# EAGLE board SparkFun GPS NEO_M9N_ANT (EAGLE 9.5.2)
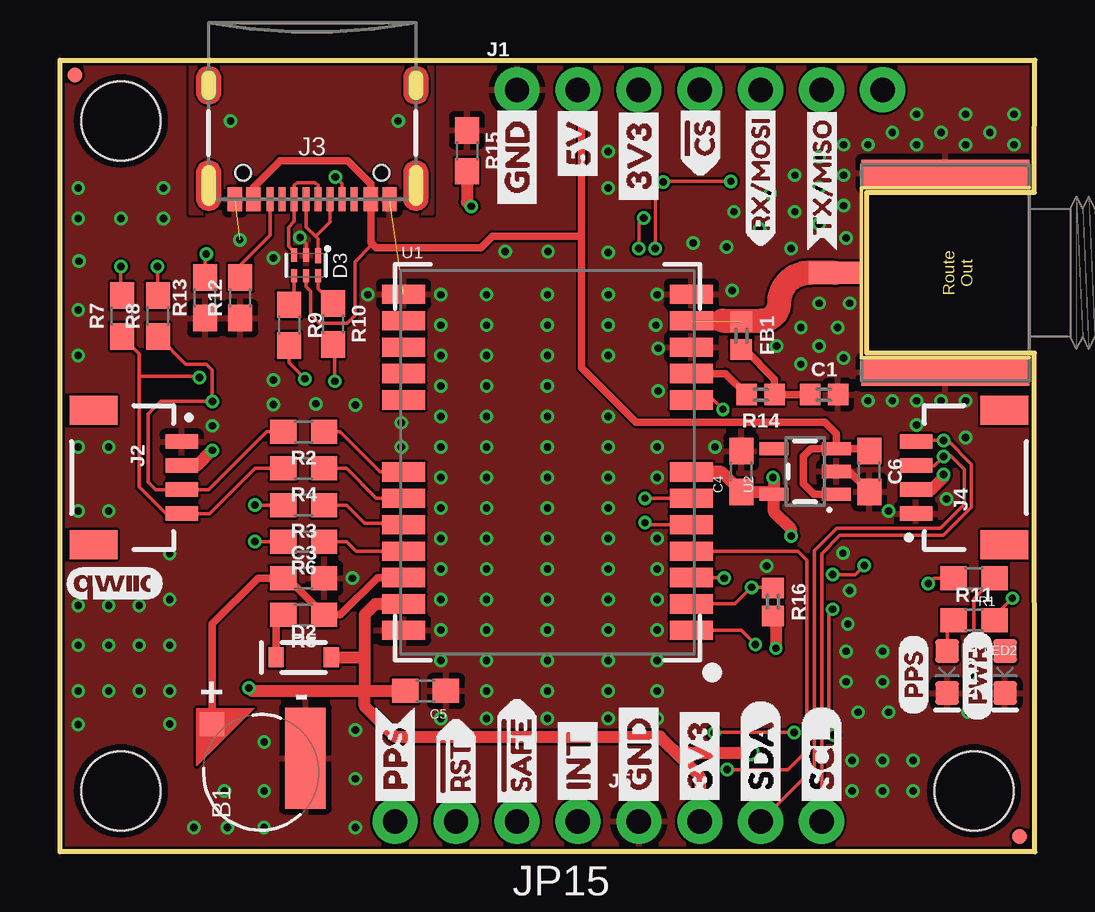
[diagram p0: board, top side]
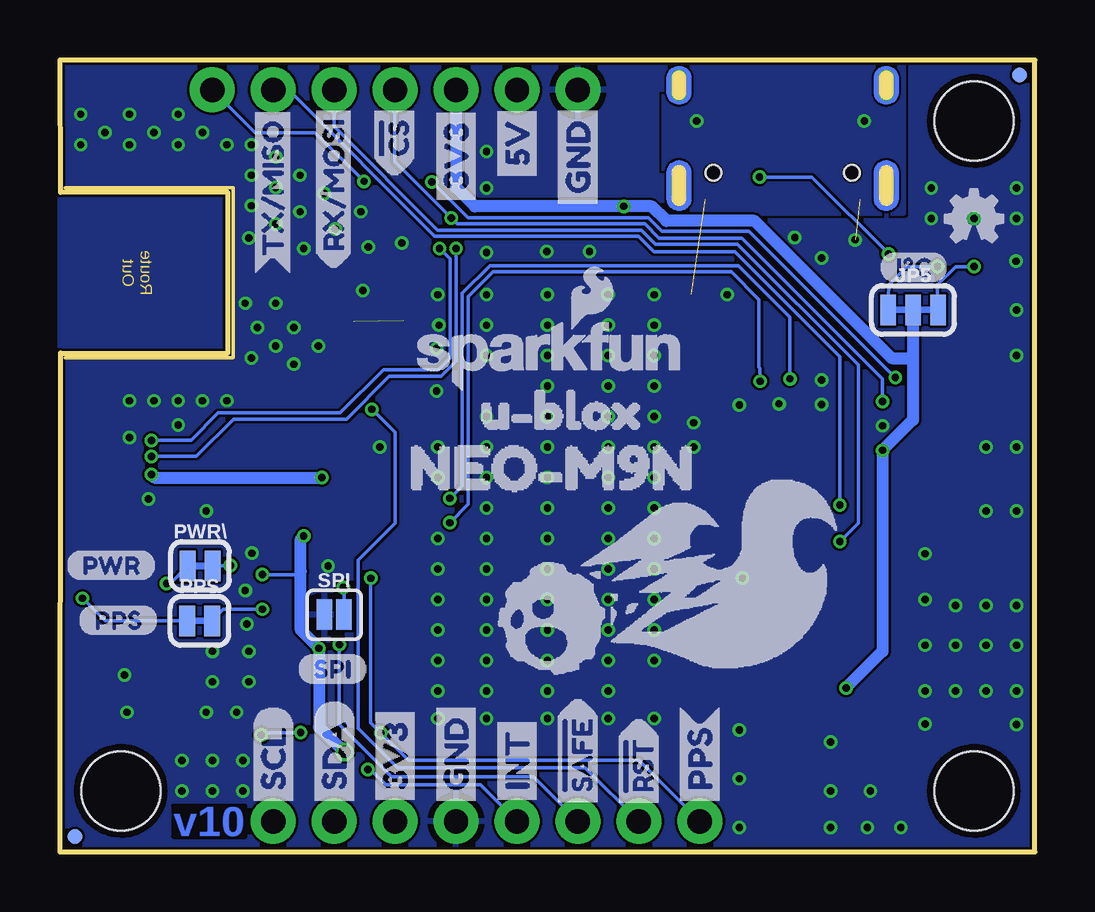
[diagram p1: board, bottom side, seen from below]

Size 40.64 x 32.99 mm. Coordinates in mm from the lower left corner, seen from the top.
Outline: 0,0 0,32.99 40.64,32.99 40.62,27.48 33.63,27.48 33.63,20.78 40.62,20.78 40.64,0 0,0
Copper layers (1*16): Top 0.035mm / dielectric 1.5mm / Bottom 0.035mm
Design rules "SparkFun-2-layer-FAB-LIMIT": minimum track width 4mil, minimum drill 6mil, track to track 4mil, track to pad 4mil, pad to pad 4mil, via to via 4mil, smd to smd 4mil, copper to edge 4mil, drill to drill 4mil, minimum pad ring 5mil, minimum via ring 5mil, stop-mask expansion 4mil, vias tented up to drill 25mil, thermal gap 10mil
Net classes: 1 vcc: width 0.152 mm; 2 3.3V: width 0.508 mm; 3 Antenna: width 1 mm, clearance 0.3 mm

## Footprints (pad centres in the part's own frame; a part is rotated, then mirrored left to right if it is on the bottom)
ML414H_IV01E = smd 1 x 1: + 2.022,2.032 | smd 4.2 x 1.7: - 0.6,-1.85
0402 = smd 0.85 x 0.9: 1 -0.58,0; 2 0.58,0
0603 = smd 1.1 x 1: 1 -0.85,0; 2 0.85,0
SOD-323 = smd 0.63 x 0.83: A 1.15,0; C -1.15,0
SOT886 = smd 0.61 x 0.25: 1 -0.405,0.5 | smd 0.56 x 0.25: 2 -0.43,0; 3 -0.43,-0.5; 4 0.43,-0.5; 5 0.43,0; 6 0.43,0.5
SMA-EDGE-SMD = smd 1.15 x 7: GND@0 -4.14,-3.5; GND@1 4.14,-3.5 | smd 0.9 x 2.2: SIG 0,-8.1
1X07_NO_SILK = drill 1.016 pad 1.88: 1 0,0; 2 2.54,0; 3 5.08,0; 4 7.62,0; 5 10.16,0; 6 12.7,0; 7 15.24,0
JST04_1MM_RA = smd 0.6 x 1.35: 1 -1.5,0; 2 -0.5,0; 3 0.5,0; 4 1.5,0 | smd 1.2 x 2: NC1 2.8,-3.675; NC2 -2.8,-3.675
USB-C-16P-2LAYER-PADS = smd 0.3 x 1: A5 -1.25,-0.34; A6 -0.25,-0.34; A7 0.25,-0.34; A8 1.25,-0.34; B5 1.75,-0.34; B6 0.75,-0.34; B7 -0.75,-0.34; B8 -1.75,-0.34 | smd 0.6 x 1: GND -3.225,-0.34; GND2 3.225,-0.34; VBUS1 -2.45,-0.34; VBUS2 2.45,-0.34 | drill 0.4 pad 0.6 long: SHLD1 -4.318,-0.915; SHLD2 4.318,-0.915; SHLD3 -4.318,-5.095; SHLD4 4.318,-5.095 | hole 0.65: -2.89,-1.445; 2.89,-1.445
1X04_NO_SILK = drill 1.016 pad 1.88: 1 0,0; 2 2.54,0; 3 5.08,0; 4 7.62,0
SMT-JUMPER_3_2-NC_TRACE_SILK = smd 0.66 x 1.27: 1 -1.041,0; 2 0,0; 3 1.041,0
MICRO-FIDUCIAL = smd 0.635 x 0.635: 1 0,0
STAND-OFF = hole 3.302: 0,0
LED-0603 = smd 1 x 1: A -0.877,0; C 0.877,0
SMT-JUMPER_2_NC_TRACE_SILK = smd 0.66 x 1.27: 1 -0.521,0; 2 0.521,0
SMT-JUMPER_2_NO_SILK = smd 0.635 x 1.27: 1 -0.406,0; 2 0.406,0
NEO-M9N/M8T/M8U = smd 1.8 x 0.8: 1 6,-7; 2 6,-5.9; 3 6,-4.8; 4 6,-3.7; 5 6,-2.6; 6 6,-1.5; 7 6,-0.4; 8 6,2.6; 9 6,3.7; 10 6,4.8; 11 6,5.9; 12 6,7; 13 -6,7; 14 -6,5.9; 15 -6,4.8; 16 -6,3.7; 17 -6,2.6; 18 -6,-0.4; 19 -6,-1.5; 20 -6,-2.6; 21 -6,-3.7; 22 -6,-4.8; 23 -6,-5.9; 24 -6,-7
SOT23-5 = smd 0.55 x 1.2: 1 -0.95,-1.3; 2 0,-1.3; 3 0.95,-1.3; 4 0.95,1.3; 5 -0.95,1.3

## Placement (x,y rotation side)
B1  6.8MM_COIN_CELL  [ML414H_IV01E]  8.38,3.3 90 top
C1  47pF  [0402]  31.85,19.05 0 top
C3  1.0uF  [0603]  10.16,11.4 0 top
C4  1.0uF  [0603]  28.4,15.85 90 top
C5  0.1uF  [0603]  15.24,6.71 180 top
C6  1.0uF  [0603]  33.73,15.85 270 top
D2  0.5A/40V/420mV  [SOD-323]  10.16,8.1 0 top
D3  PRTR5V0U2F  [SOT886]  10.26,24.43 270 top
E1  ANTENNA-GROUNDEDEDGE_RPSMA_SMD  [SMA-EDGE-SMD]  40.41,24.13 270 top
FB1  FERRITE_BEAD-120_OHM-0402  [0402]  28.4,21.51 270 top
FRAME1  FRAME-LETTER  [CREATIVE_COMMONS]  -17.78,-17.78 0 top  (outside the outline)
J1  [1X07_NO_SILK]  19.05,31.75 0 top
J2  Qwiic Right Angle  [JST04_1MM_RA]  5.08,15.6 270 top
J3  [USB-C-16P-2LAYER-PADS]  10.52,26.85 180 top
J4  Qwiic Right Angle  [JST04_1MM_RA]  35.69,15.6 90 top
J5  [1X04_NO_SILK]  24.13,1.27 0 top
JP5  JUMPER-SMT_3_2-NC_TRACE_SILK  [SMT-JUMPER_3_2-NC_TRACE_SILK]  5.08,22.58 0 bottom
JP15  [1X04_NO_SILK]  21.59,1.27 180 top
JP21  FIDUCIALUFIDUCIAL  [MICRO-FIDUCIAL]  40.01,0.64 0 top
JP31  STAND-OFF  [STAND-OFF]  2.54,30.45 0 top
JP61  FIDUCIALUFIDUCIAL  [MICRO-FIDUCIAL]  0.64,32.36 0 top
JP71  FIDUCIALUFIDUCIAL  [MICRO-FIDUCIAL]  40.01,0.64 0 bottom
JP81  FIDUCIALUFIDUCIAL  [MICRO-FIDUCIAL]  0.64,32.36 0 bottom
JP91  STAND-OFF  [STAND-OFF]  2.54,2.54 0 top
JP101  STAND-OFF  [STAND-OFF]  38.1,2.54 0 top
LED1  BLUE  [LED-0603]  36.98,7.49 270 top
LED2  RED  [LED-0603]  39.4,7.49 270 top
LOGO1  OSHW-LOGOMINI  [OSHW-LOGO-MINI]  2.54,26.39 0 bottom
LOGO2  SFE_LOGO_NAME_FLAME.1_INCH  [SFE_LOGO_NAME_FLAME_.1]  20.19,20.68 0 bottom
PPS  JUMPER-SMT_2_NC_TRACE_SILK  [SMT-JUMPER_2_NC_TRACE_SILK]  34.82,9.63 0 bottom
PWR\  JUMPER-SMT_2_NC_TRACE_SILK  [SMT-JUMPER_2_NC_TRACE_SILK]  34.8,11.91 0 bottom
R1  1k  [0603]  38.1,11.4 180 top
R2  33  [0603]  10.16,17.5 180 top
R3  33  [0603]  10.16,14.45 180 top
R4  33  [0603]  10.16,15.98 180 top
R5  1k  [0603]  10.16,9.88 180 top
R6  33  [0603]  10.16,12.93 180 top
R7  2.2k  [0603]  2.59,22.33 90 top
R8  2.2k  [0603]  4.09,22.33 90 top
R9  27  [0603]  9.55,21.95 270 top
R10  27  [0603]  11.38,22 270 top
R11  1k  [0603]  38.1,9.65 0 top
R12  5.1k  [0603]  7.52,23.09 90 top
R13  5.1k  [0603]  6.05,23.09 90 top
R14  33  [0402]  29.21,19.05 180 top
R15  100k  [0603]  16.97,29.21 270 top
R16  10k  [0402]  29.72,10.41 270 top
SPI  JUMPER-SMT_2_NO_SILK  [SMT-JUMPER_2_NO_SILK]  29.21,9.88 0 bottom
U1  U-BLOX_NEO-M9N  [NEO-M9N/M8T/M8U]  20.32,16.23 0 top
U2  3.3V  [SOT23-5]  31.06,15.85 90 top
U$1  [SDA-[)]  29.21,1.65 90 top
U$2  [NEO#M9N1]  27.69,16 0 bottom
U$3  [SCL-[)]  31.75,1.65 90 top
U$4  [SDA-[)]  29.21,1.65 90 bottom
U$5  [SCL-[)]  31.75,1.65 90 bottom
U$6  [3V3-04]  26.67,1.65 90 top
U$7  [3V3-04]  26.67,1.65 90 bottom
U$8  [GND-04]  24.13,1.65 90 top
U$9  [GND-04]  24.13,1.65 90 bottom
U$10  [I_SUPER2_C-()-03]  6.48,24.36 0 bottom
U$11  [SPI1]  30.73,7.62 0 bottom
U$12  [PPS0]  39.88,9.65 0 bottom
U$14  [QWIIC_4MM]  2.29,11.18 0 top
U$15  [INT8]  21.59,1.65 90 top
U$16  [INT8]  21.59,1.65 90 bottom
U$17  [PWR1]  40.39,11.94 0 bottom
U$18  [PWR-()-03]  38.25,5.46 90 top
U$19  [5V]  21.59,27.66 90 top
U$20  [5V]  21.59,27.66 90 bottom
U$21  [NEO_GPS_BOARD_SILK_FINAL#03#JPG]  15.24,11.43 0 bottom
U$22  [U#BLOX3]  24.51,18.39 0 bottom
U$23  [CS#-<]]  26.7,27.91 90 top
U$24  [CS#-<]]  26.7,27.91 90 bottom
U$26  [RX#MOSI2]  29.21,25.17 90 top
U$31  [RX#MOSI3]  29.24,24.23 90 bottom
U$34  [TX#MISO0]  31.78,24.99 90 top
U$35  [#RST3]  16.51,1.4 90 top
U$36  [#RST3]  16.51,1.4 90 bottom
U$37  [TX#MISO1]  31.78,24.03 90 bottom
U$39  [#SAFE1]  19.05,1.4 90 top
U$40  [#SAFE1]  19.05,1.4 90 bottom
U$43  [PPS5]  13.97,1.65 90 top
U$44  [PPS5]  13.97,1.65 90 bottom
U$52  [PPS0]  35.59,5.71 90 top
U$60  [3V3-04]  24.13,26.64 90 bottom
U$61  [3V3-04]  24.13,26.64 90 top
U$62  [GND-04]  19.05,26.52 90 bottom
U$63  [GND-04]  19.05,26.52 90 top

## Library data of the parts
B1 = SparkFun-Batteries; PROD_ID: BATT-14267
C1 = SparkFun-Capacitors; PROD_ID: CAP-15063
C3 C4 C6 = SparkFun-Capacitors; PROD_ID: CAP-00868
C5 = SparkFun-Capacitors; PROD_ID: CAP-00810
D2 = SparkFun-DiscreteSemi; PROD_ID: DIO-10955
D3 = SparkFun-IC-Power; PROD_ID: DIO-14084
E1 = SparkFun-RF; PROD_ID: CONN-15101
FB1 = SparkFun-Coils; MFG_PART: BLM15HB121SN1D; PROD_ID: NDUC-14206
FRAME1 LOGO1 LOGO2 U$14 = SparkFun-Aesthetics
J1 = SparkFun-Connectors
J2 J4 = SparkFun-Connectors; PROD_ID: CONN-13694
J3 = SparkFun-Connectors; PROD_ID: CONN-14122
J5 JP15 = SparkFun-Connectors; PROD_ID: CONN-09696
JP5 PPS PWR\ SPI = SparkFun-Jumpers
JP21 JP31 JP61 JP71 JP81 JP91 JP101 = SparkFun
LED1 = SparkFun-LED; PROD_ID: DIO-08575
LED2 = SparkFun-LED; PROD_ID: DIO-00819
R1 R5 R11 = SparkFun-Resistors; PROD_ID: RES-07856
R2-R4 R6 = SparkFun-Resistors; PROD_ID: RES-08270
R7 R8 = SparkFun-Resistors; PROD_ID: RES-08272
R9 R10 = SparkFun-Resistors; PROD_ID: RES-09334
R12 R13 = SparkFun-Resistors; PROD_ID: RES-12083
R14 = SparkFun-Resistors; PROD_ID: RES-14883
R15 = SparkFun-Resistors; PROD_ID: RES-07828
R16 = SparkFun-Resistors; PROD_ID: RES-14241
U1 = SparkFun-GPS; PROD_ID: IC-14651
U2 = SparkFun-IC-Power; PROD_ID: VREG-12457
U$1 U$3-U$10 U$18-U$20 U$23 U$24 U$60-U$63 = Labels
U$2 U$11 = board lables
U$12 U$17 = LEDs
U$15 U$16 U$22 = buzzard_labels (5)
U$21 = NEO_GPS_board_silk_FINAL#03#jpg
U$26 U$31 U$34 U$37 = buzzard_labels (36)
U$35 U$36 U$39 U$40 U$43 U$44 = buzzard_labels (7)
U$52 = buzzard_labels (33)

## Nets
3.3V [3.3V]: C4.1 C5.2 D2.A J1.3 J2.2 J4.2 J5.2 JP5.2 PWR\.2 R15.2 R16.2 U1.7 U1.23 U2.5
5V: C6.1 D3.5 J1.2 J3.VBUS1 J3.VBUS2 U2.1 U2.3
!RESET: JP15.3 U1.8
!SAFE: JP15.2 U1.1
BACKUP: B1.+ C3.1 R5.1 U1.22
D+: D3.4 R9.1
D-: D3.6 R10.1
D_SEL: R16.1 SPI.2 U1.2
GND: B1.- C1.2 C3.2 C4.2 C5.1 C6.2 D3.2 E1.GND@0 E1.GND@1 J1.1 J2.1 J3.GND J3.GND2 J4.1 J5.1 LED1.C LED2.C R12.1 R13.1 R15.1 SPI.1 U1.10 U1.12 U1.13 U1.24 U2.2
GPS_ANT1 [Antenna]: E1.SIG FB1.1 U1.11
INT: JP15.1 U1.4
N$1: PWR\.1 R1.2
N$2: LED1.A R11.1
N$3: C1.1 FB1.2 R14.1
N$4: PPS.1 R11.2
N$5: JP5.1 R8.2
N$6: D2.C R5.2
N$7: J3.B5 R12.2
N$8: JP5.3 R7.2
N$9: J3.A5 R13.2
N$10: LED2.A R1.1
N$11: R9.2 U1.6
N$12: R10.2 U1.5
PPS: JP15.4 PPS.2 U1.3
RXI/MOSI: J1.5 R6.2
RXLV: R6.1 U1.21
SCL/SCK: J1.7 J2.4 J4.4 J5.4 R4.2 R7.1
SCL_LV: R4.1 U1.19
SDA/!CS: J1.4 J2.3 J4.3 J5.3 R2.2 R8.1
SDA_LV: R2.1 U1.18
SHLD: J3.SHLD1 J3.SHLD2 J3.SHLD3 J3.SHLD4
TXLV: R3.1 U1.20
TXO/MISO: J1.6 R3.2
USB_D+: D3.3 J3.A6 J3.B6
USB_D-: D3.1 J3.A7 J3.B7
VCC_RF: R14.2 U1.9

## Tracks (layer width: path | path; a pad name or v marks a point on that pad's centre or on a via)
3.3V  (via drill 0.3, 0.51)
  Top 0.152: v33.53,11.94 33.15,11.56 v32.21,11.56
  Top 0.508: U2.5 29.66,15 C4.1 27.57,15.83 U1.7 | v29.72,15.6 29.76,15.55 U2.5 | J4.2 36.33,15.1 36.83,15.6 v36.83,15.72 | v30.48,13.16 30.48,13.44 29.76,14.15 U2.5 | 25.96,3.86 25.02,4.8 13.97,4.8 12.7,6.07 12.7,6.71 | 25.96,3.86 26.67,3.15 J5.2 | 12.7,8.1 12.7,9.88 13.15,10.33 U1.23 | v7.87,6.83 8,6.71 12.7,6.71 | D2.A 12.7,8.1 | R15.2 16.97,27.08 v17.14,26.9 | 25.96,3.86 26.24,4.14 28.75,4.14 v28.78,4.17 | 12.7,6.71 C5.2 | 12.7,8.1 12.7,6.71 | R16.2 29.84,9.71 v29.84,8.48 | J2.2 5.71,16.1 v6.35,16.73
  Bottom 0.152: PWR\.2 33.55,11.91 v33.53,11.94 | v32.21,11.56 30.73,11.56 30.61,11.68
  Bottom 0.508: v36.83,15.72 36.7,15.6 v29.72,15.6 | v7.87,6.83 6.35,8.36 v6.35,16.73 5.08,18 5.08,20.57 | J1.3 24.13,27.69 23.34,26.9 v17.14,26.9 15.98,26.9 15.37,26.29 11.69,26.29 5.97,20.57 5.08,20.57 | v30.48,13.16 30.61,13.03 30.61,11.68 30.61,9.25 v29.84,8.48 29.84,5.21 28.8,4.17 v28.78,4.17 | JP5.2 5.08,20.57
5V
  Top 0.152: D3.5 10.26,23.55 10.44,23.37 10.44,22.38 10.79,22.02 11.96,22.02 12.29,22.35 12.29,24.59 12.98,25.27 13.08,25.27
  Top 0.254: 33.65,16.78 C6.1 | J1.2 21.74,31.6 21.74,31.57
  Top 0.305: 33.65,16.78 33.66,16.78 33.63,16.8 U2.3 | U2.3 31.3,16.8 30.99,16.48 30.99,15.34 31.43,14.9 U2.1 | J3.VBUS2 8.07,27.7 9.17,28.8 11.99,28.8 12.97,27.83 J3.VBUS1 12.97,25.39 13.08,25.27 13.18,25.17 17.55,25.17 18.03,25.65 21.74,25.65 | 21.74,31.57 21.74,25.65 | 21.74,25.65 21.74,20.17 24,17.91 31.88,17.91 32.36,17.42 U2.3
!RESET  (via drill 0.3)
  Top 0.152: v27.64,18.44 27.25,18.83 U1.8
  Bottom 0.152: JP15.3 18.75,3.5 26.57,3.5 28.22,5.16 28.22,12.14 26.67,13.69 26.67,17.48 v27.64,18.44
!SAFE  (via drill 0.3)
  Top 0.152: v28.99,8.64 28.41,9.23 U1.1
  Bottom 0.152: JP15.2 20.9,3.12 26.82,3.12 29.01,5.31 29.01,8.63 v28.99,8.64
BACKUP
  Top 0.152: 9.49,11.4 C3.1
  Top 0.305: 9.49,11.4 R5.1 11.68,9.88 13.23,11.43 U1.22 | C3.1 8.26,11.4 6.35,9.5 B1.+
D+
  Top 0.152: R9.1 9.76,23.01 D3.4
D-
  Top 0.152: R10.1 10.76,23.46 D3.6
D_SEL  (via drill 0.3)
  Top 0.152: U1.2 28.14,10.33 v28.83,11.02 29.69,11.02
  Top 0.254: 29.69,11.02 R16.1
  Bottom 0.152: SPI.2 28.8,11 v28.83,11.02
GND  (via drill 0.3)  (2 unrouted)
  Top 0.152: D3.2 10.26,25.35 v10.01,25.6
  Top 0.305: U2.2 32.88,15.85 C6.2
  other vias: 6.35,17.75 32.84,9.5 32.64,12.45 33.27,5.82 33.02,3.81 15.88,9.25 17.78,9.25 8.51,2.54 12.19,11.4 12.83,23.22 36.96,14.71 20.32,9.25 22.86,9.25 24.89,9.25 15.88,10.52 17.78,10.52 20.32,10.52 22.86,10.52 24.89,10.52 15.88,11.79 17.78,11.79 20.32,11.79 22.86,11.79 24.89,11.79 15.88,13.06 17.78,13.06 20.32,13.06 22.86,13.06 24.89,13.06 15.88,14.33 17.78,14.33 20.32,14.33 22.86,14.33 15.88,15.6 17.78,15.6 20.32,15.6 22.86,15.6 24.89,15.6 15.88,16.87 17.78,16.87 20.32,16.87 22.86,16.87 24.89,16.87 15.88,18.14 17.78,18.14 20.32,18.14 22.86,18.14 15.88,19.41 17.78,19.41 20.32,19.41 24.94,19.2 15.88,20.68 17.78,20.68 20.32,20.68 22.86,20.68 24.94,20.98 15.88,21.95 17.78,21.95 20.32,21.95 22.86,21.95 24.84,21.95 15.88,23.22 17.78,23.22 20.32,23.22 22.86,23.22 24.89,23.22 22.86,27.66 22.86,29.18 27.3,16.87 33.02,2.54 35.56,2.54 35.56,3.81 6.86,2.54 5.59,1.02 0.79,24.61 0.76,26.39 0.76,27.66 0.76,14.2 0.76,16.87 0.76,20.68 0.76,22.58 0.76,5.31 0.76,6.71 0.76,8.61 0.76,10.26 2.03,6.71 2.03,8.61 2.03,10.26 3.3,6.71 3.3,8.61 3.3,10.26 4.57,5.33 4.57,6.71 4.57,8.61 4.57,10.52 4.57,12.42 15.88,7.98 17.78,7.98 20.32,7.98 22.86,7.98 24.89,7.98 17.78,6.71 20.32,6.71 22.86,6.71 24.89,6.71 15.88,5.56 17.78,5.56 20.32,5.56 22.86,5.56 24.89,5.56 2.54,26.39 4.32,26.39 4.32,27.66 7.49,25.5 14.22,16.87 14.22,17.88 12.32,18.62 10.67,18.67 34.29,2.54 34.29,3.81 32.77,8.36 34.29,8.36 2.03,14.2 2.03,16.87 29.16,25.96 28.02,23.39 6.99,1.02 12.32,3.05 12.32,5.08 8.51,4.57 37.95,7.37 34.29,7.09 32.77,7.09 37.85,5.82 34.54,5.82 8.51,1.02 12.32,1.02 29.46,11.91 8.89,19.66 8.89,18.64 22.86,24.97 18.57,25.02 20.35,25.02 26.39,25.37 8.89,24.74 31.65,26.16 34.54,14.2 32.92,10.9 32.77,25.58 27.79,25.2 30.48,25.15 32.92,22.86 31.65,22.86 30.89,21.84 29.87,21.08 32.41,21.84 31.65,21.08 32.66,20.57 30.89,20.32 32.66,26.92 32.66,28.19 32.66,29.46 33.68,29.46 34.7,29.97 35.71,29.46 36.73,29.97 37.74,29.46 38.76,29.97 39.78,29.46 33.68,18.8 34.7,18.8 35.71,18.8 36.73,18.8 37.74,18.8 35.71,17.78 37.74,17.27 31.65,27.69 31.65,28.96 30.63,28.19 30.63,26.67 29.62,27.43 28.09,26.67 39.78,30.73 37.74,30.73 35.71,30.73
  pour Top (rank 2): 0,32.99 40.64,32.99 40.64,0 0,0
  pour Bottom (rank 2): 0,32.99 40.64,32.99 40.64,0 0,0
GPS_ANT1  (1 unrouted)
  Top 0.8: U1.11 27.63,22.13
  Top 1: 27.63,22.13 29.24,22.13 arc90 29.97,22.86 arc-90 31.24,24.13 E1.SIG
INT  (via drill 0.3)
  Top 0.152: v27.81,3.43 30.35,3.43 31.14,4.22 31.14,12.14 30.75,12.53 U1.4
  Bottom 0.152: JP15.1 23.11,2.79 27.05,2.79 27.69,3.43 v27.81,3.43
N$1  (via drill 0.3)
  Top 0.152: v36.2,11.18 36.42,11.4 R1.2
  Bottom 0.152: v36.2,11.18 36.04,11.18 PWR\.1
N$2
  Top 0.152: LED1.A 36.98,9.38 R11.1
N$3
  Top 0.254: FB1.2 28.55,20.93
  Top 0.305: C1.1 R14.1 29.79,19.69 28.55,20.93
N$4  (via drill 0.3)
  Top 0.152: v39.7,10.57 38.95,9.82 R11.2
  Bottom 0.152: v39.7,10.57 38.76,9.63 PPS.1
N$5  (via drill 0.3)
  Top 0.152: R8.2 4.06,23.2 v4.06,24.38
  Bottom 0.152: v4.06,24.38 5.33,24.38 6.1,23.62 JP5.1
N$6
  Top 0.152: 9.01,9.58 R5.2
  Top 0.305: D2.C 9.01,9.58
N$7
  Top 0.152: J3.B5 8.77,25.69 7.52,24.44 R12.2
N$8  (via drill 0.3)
  Top 0.152: R7.2 2.54,23.23 v2.54,24.38
  Bottom 0.152: v2.54,24.38 3.3,24.38 4.06,23.62 JP5.3
N$9  (via drill 0.3)
  Top 0.152: J3.A5 11.77,27.83 v11.48,28.12 | v6.1,24.92 6.04,24.87 R13.2
  Bottom 0.152: v11.48,28.12 9.3,28.12 v6.1,24.92
N$10
  Top 0.152: R1.1 38.1,10.55 38.1,9.14 38.87,8.37 LED2.A
N$11  (via drill 0.3)
  Top 0.152: R9.2 9.55,20.37 v10.21,19.71 | U1.6 v24.39,14.73 v24.38,14.73
  Bottom 0.152: v10.21,19.71 10.21,22.28 12.36,24.42 22.72,24.42 23.88,23.27 23.88,15.24 v24.38,14.73
N$12  (via drill 0.3)
  Top 0.152: R10.2 11.46,21.07 v11.46,19.61 | U1.5 24.47,13.63 v24.38,13.72
  Bottom 0.152: v11.46,19.61 11.46,20.14 11.51,20.19 11.51,23.01 12.66,24.17 22.59,24.17 23.62,23.14 23.62,14.48 v24.38,13.72
PPS  (via drill 0.3)
  Top 0.152: v32.21,10.11 32.05,9.96 32.05,5.05 v32.24,4.87 | v30.61,4.98 27.29,4.98 v27.27,4.96 | U1.3 27.66,11.43 v27.69,11.4
  Bottom 0.152: JP15.4 16.51,3.81 26.12,3.81 v27.27,4.96 27.69,5.38 v27.69,11.4 | v32.21,10.11 33.83,10.11 PPS.2 | v32.24,4.87 32.14,4.97 v30.61,4.97 v30.61,4.98
RXI/MOSI  (via drill 0.3)
  Top 0.152: R6.2 v8.13,12.93
  Bottom 0.152: v8.13,12.93 7.37,13.69 7.37,20.3 12.39,25.32 15.82,25.32 16.41,25.91 24.89,25.91 29.21,30.23 J1.5
RXLV
  Top 0.152: R6.1 11.94,12.93 12.34,12.53 U1.21
SCL/SCK  (via drill 0.3)
  Top 0.152: R4.2 8.13,15.98 6.25,14.1 J2.4 4.42,14.1 3.3,15.21 3.3,19.81 | J4.4 35.74,17.15 v36.83,17.15 37.01,17.15 38,16.16 38,14.35 36.83,13.18 32.51,13.18 31.75,12.42 J5.4 | R7.1 3.3,20.77 3.3,19.81 | 3.3,19.81 5.77,19.81 v5.82,19.76 | v24.82,25.15 24.82,27.58 v25.15,27.91 25.17,27.94 v27.96,27.94
  Bottom 0.152: v5.82,19.76 11.91,25.86 15.55,25.86 16.11,26.42 23.62,26.42 25.12,27.91 v25.15,27.91 | v36.83,17.15 35.18,17.15 34.04,18.29 28.96,18.29 27.15,20.09 24.87,20.09 24.38,20.57 24.38,24.71 v24.82,25.15 | v27.96,27.94 30,29.97 32.51,29.97 J1.7
SCL_LV
  Top 0.152: R4.1 11.94,15.98 13.18,14.73 U1.19
SDA/!CS  (via drill 0.3)
  Top 0.152: J4.3 36.45,16.1 v36.83,16.48 36.86,16.51 37.13,16.51 37.69,15.95 37.69,14.48 36.7,13.49 32.39,13.49 31.45,12.55 31.45,3.5 J5.3 | v24.13,25.15 24.13,26.21 v24.33,26.42 | R8.1 5.25,20.32 6.1,20.32 6.35,20.07 v6.35,18.77 4.19,18.77 3.68,18.26 3.68,15.39 3.98,15.1 J2.3 6.21,15.1 8.61,17.5 R2.2
  Bottom 0.152: v6.35,18.77 6.35,19.71 12.22,25.58 15.67,25.58 16.26,26.16 24.08,26.16 v24.33,26.42 26.68,28.77 26.68,31.74 J1.4 | v36.83,16.48 34.96,16.48 33.4,18.03 28.7,18.03 26.92,19.81 24.77,19.81 24.13,20.45 v24.13,25.15
SDA_LV
  Top 0.152: R2.1 11.68,17.5 13.35,15.83 U1.18
SHLD  (via drill 0.3)
  other vias: 14.1,30.45 7.11,30.45
  pour Bottom: 15.49,32.99 15.49,26.62 5.46,26.62 5.46,32.99
  pour Top: 15.49,32.99 15.49,26.62 5.46,26.62 5.46,32.99
TXLV
  Top 0.152: R3.1 11.94,14.45 12.7,13.69 14.26,13.69 U1.20
TXO/MISO  (via drill 0.3)
  Top 0.152: R3.2 v8.13,14.45
  Bottom 0.152: v8.13,14.45 8.13,20.63 12.51,25.01 15.89,25.01 16.54,25.65 25.02,25.65 31.09,31.73 31.73,31.73 J1.6
USB_D+
  Top 0.152: J3.A6 10.77,27.77 10.64,27.89 9.88,27.89 9.77,27.77 J3.B6 9.77,26.28 9.53,26.04 9.53,25.23 9.76,24.99 D3.3
USB_D-
  Top 0.152: J3.A7 10.27,26.03 10.65,25.64 | J3.B7 11.27,26.25 10.65,25.64 | D3.1 10.76,25.54 10.65,25.64
VCC_RF
  Top 0.305: U1.9 27.75,19.93 R14.2

## Text on the board
Bottom: v10
tPlace: + | -
Measures: Measurements in inches
tDocu: Elias Santistevan